# EAGLE board DDS_rev03JD (EAGLE 7.5.0)
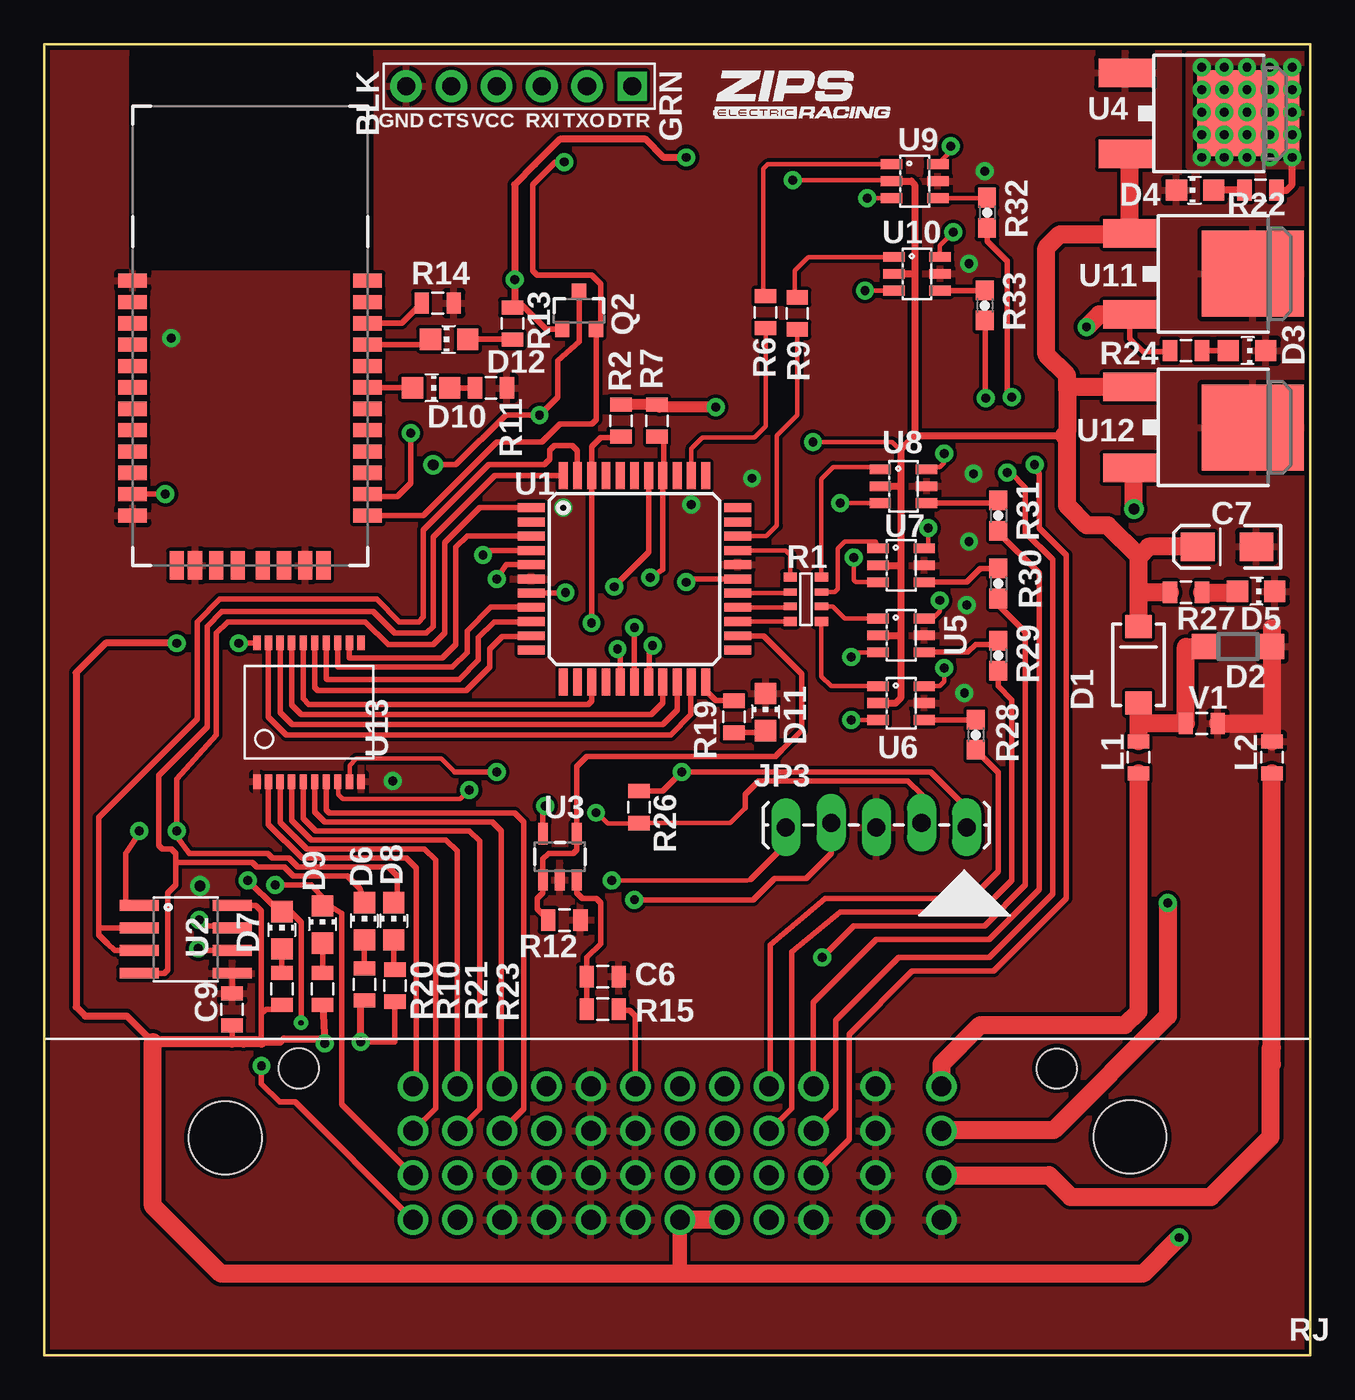
[diagram p0: board, top side]
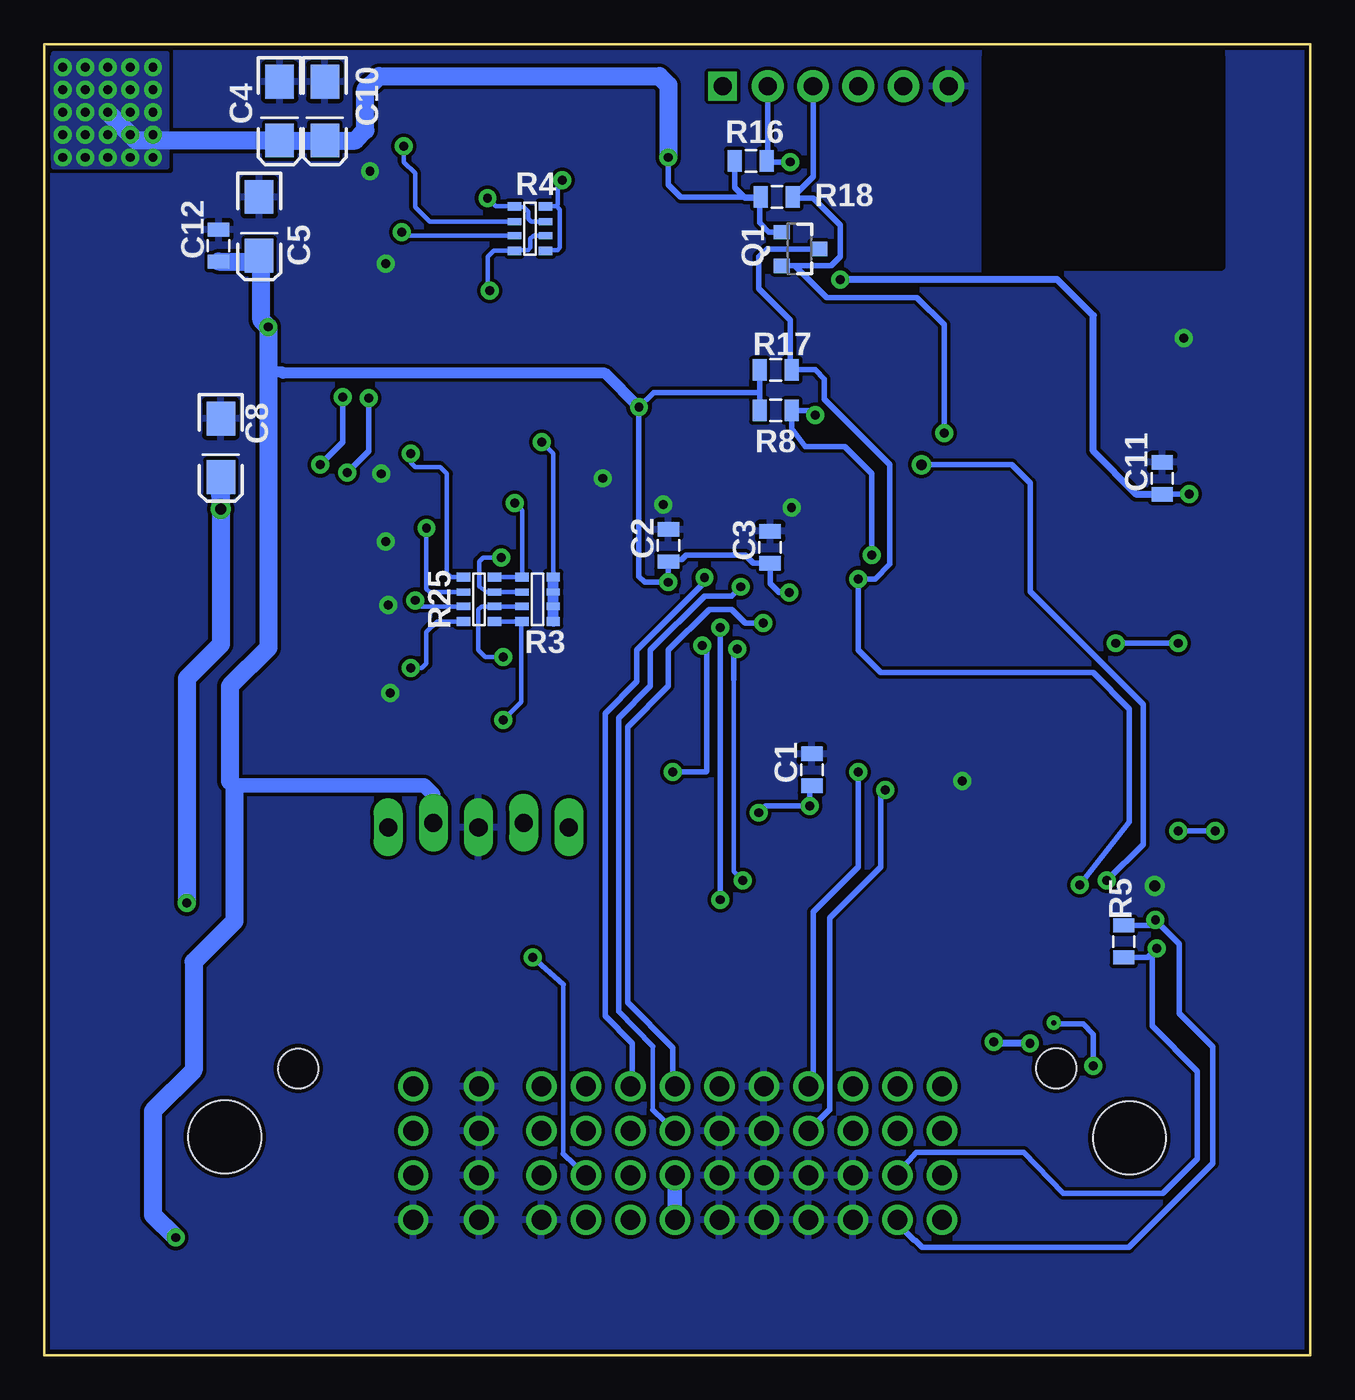
[diagram p1: board, bottom side, seen from below]

Size 71.12 x 73.66 mm. Coordinates in mm from the lower left corner, seen from the top.
Copper layers (1*16): Top 0.035mm / dielectric 1.5mm / Bottom 0.035mm
Design rules "SparkFun *": minimum track width 8mil, minimum drill 18mil, track to track 8mil, track to pad 8mil, pad to pad 8mil, via to via 8mil, smd to smd 8mil, copper to edge 10mil, drill to drill 8mil, minimum pad ring 12mil, minimum via ring 10mil, stop-mask expansion 4mil, vias tented up to drill 25mil, thermal gap 10mil
tRestrict: area 5,61.2 to 18.3,73
bRestrict: area 5,61.2 to 18.3,73

## Footprints (pad centres in the part's own frame; a part is rotated, then mirrored left to right if it is on the bottom)
0805 = smd 0.8 x 1.2: 1 -0.9,0; 2 0.9,0
EIA3216-16V = smd 1.9 x 1.6: A 1.65,0; C -1.65,0
SMA = smd 1.27 x 1.47: A -2.15,0; C 2.15,0
SOD-123 = smd 1.4 x 1.4: A 1.9,0; C -1.9,0
CHIP_LED0805 = smd 1.2 x 1.2: A 0,-1.05; C 0,1.05
36638-M = drill 1.1: 1 20.7,15.1; 2 20.7,12.6; 3 20.7,10.1; 4 20.7,7.6; 5 23.2,15.1; 6 23.2,12.6; 7 23.2,10.1; 8 23.2,7.6; 9 25.7,15.1; 10 25.7,12.6; 11 25.7,10.1; 12 25.7,7.6; 13 28.2,15.1; 14 28.2,12.6; 15 28.2,10.1; 16 28.2,7.6; 17 30.7,15.1; 18 30.7,12.6; 19 30.7,10.1; 20 30.7,7.6; 21 33.2,15.1; 22 33.2,12.6; 23 33.2,10.1; 24 33.2,7.6; 25 35.7,15.1; 26 35.7,12.6; 27 35.7,10.1; 28 35.7,7.6; 29 38.2,15.1; 30 38.2,12.6; 31 38.2,10.1; 32 38.2,7.6; 33 40.7,15.1; 34 40.7,12.6; 35 40.7,10.1; 36 40.7,7.6; 37 43.2,15.1; 38 43.2,12.6; 39 43.2,10.1; 40 43.2,7.6; 41 46.7,15.1; 42 46.7,12.6; 43 46.7,10.1; 44 46.7,7.6; 45 50.4,15.1; 46 50.4,12.6; 47 50.4,10.1; 48 50.4,7.6 | hole 2.25: 56.87,16.1; 14.28,16.12 | hole 4.1: 60.99,12.26; 10.16,12.21
1X05_LOCK_LONGPADS = drill 1.016 long: 1 0,0; 2 2.54,-0.254; 3 5.08,0; 4 7.62,-0.254; 5 10.16,0
FTDI_DEVICE_SIDE = drill 1 square: P$1 -6.35,0 | drill 1.016 pad 1.778: P$2 -3.81,0; P$3 -1.27,0; P$4 1.27,0; P$5 3.81,0; P$6 6.35,0
SOT23 = smd 0.8 x 0.9: 1 -0.95,-1; 2 0.95,-1; 3 0,1.1
MNR14 = smd 0.5 x 0.75: 1 -1.25,-0.9; 4 1.25,-0.9; 5 1.25,0.85; 8 -1.25,0.85 | smd 0.4 x 0.75: 2 -0.4,-0.9; 3 0.4,-0.9; 6 0.4,0.85; 7 -0.4,0.85
0603 = smd 1.1 x 1: 1 -0.85,0; 2 0.85,0
TQFP-44 = smd 1.5 x 0.5: 1 -5.8,4; 2 -5.8,3.2; 3 -5.8,2.4; 4 -5.8,1.6; 5 -5.8,0.8; 6 -5.8,0; 7 -5.8,-0.8; 8 -5.8,-1.6; 9 -5.8,-2.4; 10 -5.8,-3.2; 11 -5.8,-4; 23 5.8,-4; 24 5.8,-3.2; 25 5.8,-2.4; 26 5.8,-1.6; 27 5.8,-0.8; 28 5.8,0; 29 5.8,0.8; 30 5.8,1.6; 31 5.8,2.4; 32 5.8,3.2; 33 5.8,4 | smd 0.5 x 1.5: 12 -4,-5.8; 13 -3.2,-5.8; 14 -2.4,-5.8; 15 -1.6,-5.8; 16 -0.8,-5.8; 17 0,-5.8; 18 0.8,-5.8; 19 1.6,-5.8; 20 2.4,-5.8; 21 3.2,-5.8; 22 4,-5.8; 34 4,5.8; 35 3.2,5.8; 36 2.4,5.8; 37 1.6,5.8; 38 0.8,5.8; 39 0,5.8; 40 -0.8,5.8; 41 -1.6,5.8; 42 -2.4,5.8; 43 -3.2,5.8; 44 -4,5.8
SO-8 = smd 0.61 x 2.21: 1 -1.905,-2.616; 2 -0.635,-2.616; 3 0.635,-2.616; 4 1.905,-2.616; 5 1.905,2.616; 6 0.635,2.616; 7 -0.635,2.616; 8 -1.905,2.616
SOT23-5 = smd 0.55 x 1.2: 1 -0.95,-1.3; 2 0,-1.3; 3 0.95,-1.3; 4 0.95,1.3; 5 -0.95,1.3
DPAK = smd 1.6 x 3: 1 -2.28,-4.04; 3 2.28,-4.04 | smd 4.826 x 5.715: 2 0,2.858
SOT23-6 = smd 0.55 x 1.2: 1 -0.95,-1.3; 2 0,-1.3; 3 0.95,-1.3; 4 0.95,1.3; 5 0,1.3; 6 -0.95,1.3
SSOP-20 = smd 0.813 x 0.406: 1 -3.9,2.925; 2 -3.9,2.275; 3 -3.9,1.625; 4 -3.9,0.975; 5 -3.9,0.325; 6 -3.9,-0.325; 7 -3.9,-0.975; 8 -3.9,-1.625; 9 -3.9,-2.275; 10 -3.9,-2.925; 11 3.9,-2.925; 12 3.9,-2.275; 13 3.9,-1.625; 14 3.9,-0.975; 15 3.9,-0.325; 16 3.9,0.325; 17 3.9,0.975; 18 3.9,1.625; 19 3.9,2.275; 20 3.9,2.925
RN41 = smd 0.8 x 1.6: 1 -6.6,-6.6; 2 -5.4,-6.6; 3 -4.2,-6.6; 4 -3,-6.6; 5 -1.8,-6.6; 6 -0.6,-6.6; 7 0.6,-6.6; 8 1.8,-6.6; 9 3,-6.6; 10 4.2,-6.6; 11 5.4,-6.6; 12 6.6,-6.6; 13 6.6,6.6; 14 5.4,6.6; 15 4.2,6.6; 16 3,6.6; 17 1.8,6.6; 18 0.6,6.6; 19 -0.6,6.6; 20 -1.8,6.6; 21 -3,6.6; 22 -4.2,6.6; 23 -5.4,6.6; 24 -6.6,6.6 | smd 1.6 x 0.8: 28 9.4,3.1; 29 9.4,-3.1; 30 9.4,4.122; 31 9.4,1.9; 32 9.4,0.7; 33 9.4,-0.7; 34 9.4,-1.9; 35 9.4,-4.122

## Placement (x,y rotation side)
C1  \0.1UF  [0805]  28,32.89 90 bottom
C2  \0.1UF  [0805]  36.07,45.5 90 bottom
C3  \0.1UF  [0805]  30.35,45.4 90 bottom
C4  10UF  [EIA3216-16V]  57.91,69.91 270 bottom
C5  10UF  [EIA3216-16V]  59.05,63.44 270 bottom
C6  1UF  [0805]  31.37,21.27 0 top
C7  10UF  [EIA3216-16V]  66.45,45.43 180 top
C8  10UF  [EIA3216-16V]  61.21,50.99 270 bottom
C9  \0.1UF  [0805]  10.54,19.43 90 top
C10  10UF  [EIA3216-16V]  55.37,69.91 270 bottom
C11  \0.1UF  [0805]  8.32,49.28 90 bottom
C12  \0.1UF  [0805]  61.34,62.36 90 bottom
D1  S1B  [SMA]  61.47,38.8 90 top
D2  11V  [SOD-123]  67.06,39.81 0 top
D3  GREEN  [CHIP_LED0805]  67.56,56.45 270 top
D4  GREEN  [CHIP_LED0805]  64.64,65.47 90 top
D5  GREEN  [CHIP_LED0805]  68.07,42.93 270 top
D6  GREEN  [CHIP_LED0805]  17.97,24.38 0 top
D7  GREEN  [CHIP_LED0805]  13.34,23.88 0 top
D8  RED  [CHIP_LED0805]  19.62,24.38 0 top
D9  RED  [CHIP_LED0805]  15.62,24.19 0 top
D10  AMBER  [CHIP_LED0805]  21.72,54.36 270 top
D11  AMBER  [CHIP_LED0805]  40.51,36.13 0 top
D12  YELLOW  [CHIP_LED0805]  22.73,57.09 90 top
J1  36638NEW  [36638-M]  0,0 0 top
JP3  [1X05_LOCK_LONGPADS]  51.82,29.65 180 top
JP19  FTDI_DEVICE  [FTDI_DEVICE_SIDE]  26.67,71.31 180 top
L1  L_FB_2A  [0805]  61.47,33.59 90 top
L2  L_FB_2A  [0805]  68.96,33.59 90 top
Q1  BSS123  [SOT23]  28.7,62.17 270 bottom
Q2  BSS123  [SOT23]  30.04,58.67 0 top
R1  1K  [MNR14]  42.8,42.48 270 top
R2  2.2K  [0805]  32.38,52.51 90 top
R3  RN-4_10K  [MNR14]  43.43,42.48 90 bottom
R4  10K  [MNR14]  43.81,63.31 270 bottom
R5  120  [0805]  10.48,23.24 90 bottom
R6  1K  [0805]  40.51,58.61 90 top
R7  2.2K  [0805]  34.42,52.51 90 top
R8  10K  [0805]  30.04,53.09 180 bottom
R9  1K  [0805]  42.29,58.55 90 top
R10  1K  [0805]  15.62,20.57 270 top
R11  330  [0805]  25.08,54.36 180 top
R12  10K  [0805]  29.21,24.45 180 top
R13  330  [0805]  26.29,57.98 90 top
R14  100K  [0805]  22.1,59.12 180 top
R15  10K  [0805]  31.37,19.43 0 top
R16  10K  [0805]  31.43,67.12 180 bottom
R17  10K  [0805]  30.04,55.37 180 bottom
R18  10K  [0805]  29.97,65.09 180 bottom
R19  1K  [0805]  38.73,35.88 90 top
R20  1K  [0805]  13.34,20.57 270 top
R21  1K  [0805]  17.97,20.83 270 top
R22  330  [0805]  68.33,65.47 0 top
R23  1K  [0805]  19.68,20.76 270 top
R24  1K  [0805]  64.14,56.45 180 top
R25  RN-4_10K  [MNR14]  46.74,42.48 90 bottom
R26  10K  [0805]  33.4,30.8 270 top
R27  1.2K  [0805]  64.14,42.86 180 top
R28  RESPLACEHOLDER  [0603]  52.32,34.86 270 top
R29  RESPLACEHOLDER  [0603]  53.59,39.31 270 top
R30  RESPLACEHOLDER  [0603]  53.59,43.37 270 top
R31  RESPLACEHOLDER  [0603]  53.59,47.18 270 top
R32  RESPLACEHOLDER  [0603]  52.96,64.2 270 top
R33  RESPLACEHOLDER  [0603]  52.83,58.99 270 top
U1  PIC18F45K22  [TQFP-44]  33.15,43.62 0 top
U2  SN75HVD08DRSOIC  [SO-8]  7.94,23.37 270 top
U3  OPA344  [SOT23-5]  28.96,28 0 top
U4  NCP1117DT_3.3  [DPAK]  64.77,69.79 270 top
U5  DMG6602SVTQ  [SOT23-6]  48.13,40.45 270 top
U6  DMG6602SVTQ  [SOT23-6]  48.13,36.64 270 top
U7  DMG6602SVTQ  [SOT23-6]  48.13,44.39 270 top
U8  DMG6602SVTQ  [SOT23-6]  48.26,48.83 270 top
U9  DMG6602SVTQ  [SOT23-6]  48.9,65.98 270 top
U10  DMG6602SVTQ  [SOT23-6]  49.02,60.77 270 top
U11  NCV7805BDTRKG  [DPAK]  65.02,60.77 270 top
U12  NCV7805BDTRKG  [DPAK]  65.02,52.13 270 top
U13  MAX6818  [SSOP-20]  14.86,36.13 90 top
U$1  INDPK1  [PICKIT-PIN-1]  51.69,27.24 180 top
U$2  BLUETOOTH-RN41"  [RN41]  11.56,53.78 270 top
U$3  LOGO16-2-M  [2016-2-LOGO-M]  37.49,69.44 0 top
V1  10.8V  [0805]  65.02,35.5 0 top

## Library data of the parts
C1-C3 C9 C11 C12 = FSAE Electric; PARTNO: CC0805ZRY5V9BB104
C4 C5 C7 C8 C10 = FSAE Electric; PARTNO: T491A106M016AT
C6 = FSAE Electric; PARTNO: UMK212F105ZG-T
D1 = FSAE Electric; PARTNO: S1B
D2 = FSAE Electric; PARTNO: NZH11C,115
D3-D7 = FSAE Electric; PARTNO: LTST-S220GKT
D8 D9 = FSAE Electric; PARTNO: LH R974-LP-1
D10 D11 = FSAE Electric; PARTNO: HSMA-C170
D12 = FSAE Electric; PARTNO: LY R976-PS-36
J1 R28-R33 U$1 = FSAE Electric
JP3 JP19 = SparkFun-Connectors
L1 L2 = FSAE Electric; PARTNO: FBMH2012HM121-T
Q1 Q2 = FSAE Electric; PARTNO: BSS123,215
R1 = FSAE Electric; PARTNO: MNR14ERAPJ102
R2 R7 = FSAE Electric; PARTNO: RC0805FR-072K2L
R3 R4 R25 = FSAE Electric; PARTNO: MNR14ERAPJ103
R5 = FSAE Electric; PARTNO: RC0805FR-07120RL
R6 R9 R10 R19-R21 R23 R24 = FSAE Electric; PARTNO: RC0805FR-071KL
R8 R12 R15-R18 R26 = FSAE Electric; PARTNO: RC0805FR-0710KL
R11 R13 R22 = FSAE Electric; PARTNO: RC0805FR-07330RL
R14 = FSAE Electric; PARTNO: RC0805FR-07100KL
R27 = FSAE Electric; PARTNO: RC0805FR-071K2L
U1 = FSAE Electric; PARTNO: PIC18F45K22T-I/PT
U2 = FSAE Electric; PARTNO: SN75176BDR
U3 = FSAE Electric; PARTNO: OPA344NA/3K
U4 = FSAE Electric; PARTNO: NCP1117DT33RKG
U5-U10 = FSAE Electric; PARTNO: DMG6602SVTQ-7
U11 U12 = FSAE Electric; PARTNO: NCV7805BDTRKG
U13 = FSAE Electric; PARTNO: MAX6818EAP+
U$2 = SparkFun-RF; PARTNO: RN41-I/RM
U$3 = Pic
V1 = FSAE Electric; PARTNO: VCAS080509A200DP

## Nets
5V2: C8.A J1.46 U12.3
+: J1.45 L1.1
+3V3: C4.A C10.A C11.1 Q1.1 Q2.1 R13.2 R16.2 R18.2 R22.2 U4.2 U$2.11
+5V: C1.1 C2.1 C3.1 C5.A C9.1 C12.1 J1.27 J1.28 J1.32 JP3.2 R2.2 R7.2 R8.2 R10.2 R17.2 R20.2 R21.2 R23.2 R24.2 R26.2 U1.7 U1.28 U2.8 U3.5 U11.3 U13.20
+9V: C7.A D1.C R3.1 R3.2 R3.3 R3.4 R4.5 R4.8 R27.2 U4.3 U5.2 U6.2 U7.2 U8.2 U9.2 U10.2 U11.1 U12.1
-: J1.47 L2.1
_OLED0: J1.39 R32.2
_OLED1: J1.38 R33.2
_OLED2: J1.37 R31.2
_OLED3: J1.35 R30.2
_OLED4: J1.34 R29.2
_OLED5: J1.33 R28.2
ACK: J1.13 U13.9
B1: J1.1 U13.2
B2: J1.2 U13.3
BREAK: J1.6 U13.5
BSAVE: J1.5 U13.4
GHT: D1.A D2.C L1.2 V1.1
GND: C1.2 C2.2 C3.2 C4.C C5.C C6.2 C7.C C8.C C9.2 C10.C C11.2 C12.2 D2.A D3.C D4.C D5.C D11.C J1.11 J1.12 J1.15 J1.16 J1.17 J1.18 J1.19 J1.20 J1.22 J1.23 J1.24 J1.40 J1.41 J1.42 J1.43 J1.44 J1.48 JP3.3 JP19.P$6 L2.2 R11.1 R12.1 R14.1 U1.6 U1.29 U2.5 U3.2 U4.1 U5.5 U6.5 U7.5 U8.5 U9.5 U10.5 U11.2 U12.2 U13.1 U13.10 U$2.1 U$2.12 U$2.28 U$2.29 V1.2
LED0: R6.1 U1.35
LED1: R9.1 U1.31
LED2: R1.1 U1.30
LED3: R1.2 U1.27
LED4: R1.3 U1.26
LED5: R1.4 U1.25
N$1: D11.A R19.1
N$2: R19.2 U1.22
N$3: JP19.P$3 Q1.2 R18.1 U$2.14
N$4: J1.10 U13.7
N$5: R28.1 U6.4
N$6: D12.A R13.1
N$7: R25.8 U6.6
N$8: D12.C U$2.21
N$9: D10.A U$2.19
N$10: R14.2 U$2.22
N$11: D6.A R21.1
N$12: JP19.P$2 Q2.2 R16.1 U$2.13
N$13: D10.C R11.2
N$14: D8.A R23.1
N$15: D5.A R27.1
N$16: R3.8 R25.1 U6.3
N$17: D9.A R10.1
N$18: D7.A R20.1
N$19: D3.A R24.1
N$20: R29.1 U5.4
N$21: R25.7 U5.6
N$22: R3.7 R25.2 U5.3
N$23: R1.5 U6.1
N$24: J1.21 R15.2
N$25: D4.A R22.1
N$26: C6.1 R15.1 U3.3
N$27: R25.6 U7.6
N$28: R3.6 R25.3 U7.3
N$29: R1.6 U5.1
N$30: R25.5 U8.6
N$31: R3.5 R25.4 U8.3
N$32: R30.1 U7.4
N$33: R4.1 R4.7 U9.3
N$34: R4.2 U9.6
N$35: R31.1 U8.4
N$36: R4.3 U10.6
N$37: R4.4 R4.6 U10.3
N$38: R32.1 U9.4
N$39: R33.1 U10.4
N$40: JP3.4 U1.17
N$41: R1.7 U7.1
N$42: R1.8 U8.1
N$43: JP3.5 U1.16
N$44: R6.2 U9.1
N$45: R9.2 U10.1
N$46: JP3.1 R26.1 U1.18
O1: U1.3 U13.12
O2: U1.8 U13.13
O3: U1.9 U13.14
O4: U1.10 U13.15
O5: U1.14 U13.16
O6: U1.19 U13.17
O7: U1.20 U13.18
O8: U1.21 U13.19
POS-SWITCH: J1.26 U1.38
RS-A: J1.7 R5.1 U2.6
RS-B: J1.8 R5.2 U2.7
RX1: D8.C U1.1 U2.1
RX2: D9.C J1.3 Q1.3 R17.1 U1.5
SCL: J1.29 R7.1 U1.37
SDA: J1.25 R2.1 U1.42
START: J1.9 U13.6
TALK: J1.14 U13.8
TX1: D6.C U1.44 U2.4
TX2: D7.C J1.4 Q2.3 R8.1 U1.4
U2-RE/DE: U1.43 U2.2 U2.3
VOL: R12.2 U1.24 U3.1 U3.4

## Tracks (layer width: path | path; a pad name or v marks a point on that pad's centre or on a via)
5V2  (via drill 0.5, 0.6)
  Top 1.016: v63.12,25.4 63.12,19.05 56.71,12.64 50.44,12.64 J1.46 | U12.3 61.04,49.85 61.11,49.78 | 61.11,49.78 61.21,49.68 | v61.21,47.55 61.21,49.89 | 61.21,49.89 61.27,49.94 | 61.21,49.89 61.11,49.78
  Bottom 1.016: v61.21,47.55 C8.A 61.21,48.51 61.27,48.51 v61.21,47.55 | v61.21,47.55 61.21,39.94 63.12,38.04 v63.12,25.4
+
  Top 1.016: J1.45 50.4,16.36 52.58,18.54 60.71,18.54 61.47,19.3 L1.1
+3V3  (via drill 0.5)
  Top 0.305: U$2.11 v6.79,48.38 v6.79,48.39 | 27.94,67.31 27.56,66.93 | 26.42,59 26.85,59 28.19,57.66 29.07,57.66 Q2.1
  Top 0.406: R22.2 69.79,65.47 70.1,65.79 v70.1,67.31 | v36.07,67.31 34.8,67.31 33.78,68.33 28.96,68.33 27.56,66.93 26.42,65.79 v26.42,60.45 26.42,59 R13.2
  Top 0.61: 70.24,68.44 v70.1,68.58
  Top 1.016: U4.2 v67.56,69.85
  Bottom 0.305: R16.2 32.33,65.61 31.75,65.02 30.94,65.02 | 30.94,65.02 R18.2 35.37,65.09 36.07,65.79 v36.07,67.31 | 30.94,65.02 30.94,63.64 30.41,63.12 Q1.1 | v6.79,48.39 8.31,48.39 C11.1
  Bottom 0.406: C11.1 9.77,48.38 12.19,50.8 12.19,58.42 14.22,60.45 v26.42,60.45
  Bottom 1.016: v36.07,67.31 36.07,71.37 36.58,71.88 52.32,71.88 53.09,71.12 53.09,68.83 53.66,68.26 C10.A C4.A 65.98,68.26 v67.56,69.85
  other vias: 65.02,67.31 65.02,68.58 65.02,69.85 65.02,71.12 65.02,72.39 66.29,72.39 66.29,71.12 66.29,69.85 66.29,68.58 66.29,67.31 67.56,67.31 67.56,68.58 67.56,71.12 67.56,72.39 68.83,72.39 68.83,71.12 68.83,69.85 68.83,68.58 68.83,67.31 70.1,69.85 70.1,71.12 70.1,72.39
  pour Bottom: 64.26,66.8 64.26,73.15 70.61,73.15 70.61,72.9 70.87,72.9 70.61,66.8
  pour Top: 64.26,66.8 70.87,66.8 70.87,73.15 64.26,73.15
+5V  (via drill 0.5)
  Top 0.254: v30.99,30.48 31.04,30.48 31.65,29.87 33.37,29.87 R26.2 38.53,29.9 39.37,30.73
  Top 0.305: U1.7 29.23,42.83 v29.27,42.86 | 11.3,17.72 11.18,17.59 | U1.28 36.26,43.62 v36.07,43.43 | 12.19,19.18 12.19,17.59 | U13.20 10.95,40.03 v10.92,40.01 | C9.1 10.54,17.59 | U3.5 28.01,30.74 v28.13,30.86 | 12.19,19.18 12.45,19.43 13.58,19.43 R20.2 | U2.8 11.87,25.27 12.19,24.96 12.19,19.18 | U11.3 60.98,57.13 61.72,56.39 63.17,56.39 R24.2 | R23.2 19.68,17.59 v17.78,17.59 | JP3.2 49.28,31.5 48.51,32.26 40.13,32.26 39.37,31.5 39.37,30.73
  Top 0.406: 12.19,17.59 13.27,17.59 13.46,17.78 15.49,17.78 v15.75,17.53 R10.2 | v17.78,17.59 17.78,19.86 R21.2 | v7.43,40.01 3.43,40.01 1.78,38.35 1.78,19.56 2.29,19.05 4.64,19.05 6.1,17.59 | 10.53,18.54 C9.1
  Top 0.61: 12.19,17.59 11.18,17.59 10.54,17.59 6.1,17.59 | v37.72,53.28 34.55,53.28 R7.2 R2.2 | 60.97,58.5 U11.3
  Top 0.813: J1.28 35.7,4.71 35.56,4.57
  Top 1.016: U11.3 59.25,58.49 v58.55,57.78 | 6.1,17.59 6.1,8.38 9.91,4.57 35.56,4.57 61.72,4.57 v63.75,6.6 | J1.32 J1.28
  Bottom 0.305: v29.27,42.86 29.84,42.86 30.35,43.37 C3.1 31.29,44.5 31.75,44.96 35.05,44.96 35.31,44.7 35.87,44.7 C2.1 v36.07,43.43 37.4,43.43 37.72,43.75 v37.72,53.28 36.89,54.1 30.99,54.1 | v10.92,40.01 v7.43,40.01 | v30.99,30.48 30.61,30.86 v28.13,30.86 28.13,31.87 C1.1 | R17.2 30.94,54.15 30.99,54.1 | R8.2 30.94,54.05 30.99,54.1
  Bottom 0.406: v15.75,17.53 17.72,17.53 v17.78,17.59
  Bottom 0.61: v37.72,53.28 39.62,55.18 57.72,55.18 57.78,55.24 58.42,55.24 58.55,55.12
  Bottom 0.813: J1.27 J1.28 | 60.71,32.26 60.45,32 49.78,32 49.28,31.5 JP3.2
  Bottom 1.016: C12.1 59.38,61.46 C5.A 58.93,61.66 58.93,58.17 v58.55,57.78 58.55,55.12 58.55,39.75 60.71,37.59 60.71,32.26 | v63.75,6.6 65.02,7.87 65.02,13.72 62.74,16 62.74,22.1 60.45,24.38 60.45,32
+9V  (via drill 0.5)
  Top 0.254: v43.18,51.31 47.62,51.31 48.13,50.8 | v42.04,66.04 47.53,66.04 U9.2
  Top 0.406: U6.2 47.82,36.64 48.13,36.96 48.13,40.51 | 48.13,40.51 48.13,44.32 | 48.13,44.32 48.13,48.77 | 48.13,48.77 48.13,50.8 48.13,50.93 48.9,51.69 49.02,51.69 | 49.02,51.69 57.28,51.69 | 61.09,41.33 D1.C | U8.2 48.07,48.83 48.13,48.77 | U7.2 48.07,44.39 48.13,44.32 | U5.2 48.07,40.45 48.13,40.51 | U9.2 48.7,65.98 48.9,65.79 48.9,60.83 | 48.9,60.83 48.9,51.82 49.02,51.69 | U10.2 48.83,60.77 48.9,60.83
  Top 1.016: U4.3 60.98,67.25 U11.1 60.93,62.99 | D1.C 61.47,42.88 | 61.47,42.88 61.47,44.86 | 61.47,44.86 61.47,44.91 59.74,46.63 58.57,46.63 57.45,47.75 57.45,51.87 | 57.45,54.3 57.45,55.07 56.29,56.24 56.29,62.23 57.05,62.99 60.71,62.99 | 60.93,62.99 61.16,62.99 61.27,62.89 60.81,62.89 60.71,62.99 | 60.71,62.99 60.93,62.99 | U12.1 57.56,54.41 57.45,54.3 | 57.45,54.3 57.45,51.87 | 57.45,51.87 57.28,51.69 | C7.A 62.04,45.43 61.47,44.86 | R27.2 61.48,42.86 61.47,42.88
  Bottom 0.254: R3.4 42.53,50.66 v43.18,51.31 | R4.5 42.92,62.1 42.29,62.1 42.16,62.23 42.16,64.39 42.33,64.56 R4.8 42.37,64.56 42.29,64.64 42.29,65.79 v42.04,66.04
  Bottom 0.61: R3.1 R3.2 R3.3 R3.4
-
  Top 1.016: 68.96,16.35 68.96,17.27 | 68.96,17.27 L2.1 | J1.47 56.45,10.1 57.66,8.89 65.53,8.89 68.9,12.26 68.9,17.21 68.96,17.27
_OLED0  (via drill 0.5)
  Top 0.305: R32.2 52.96,62.61 54.1,61.47 54.1,54.1 v54.36,53.85 | J1.39 45.21,12.11 45.21,18.03 48.77,21.59 53.34,21.59 57.4,25.65 57.4,44.96 55.88,46.48 55.88,49.53 55.63,49.78 v55.63,50.04
  Bottom 0.305: v54.36,53.85 54.36,51.31 v55.63,50.04
_OLED1  (via drill 0.5)
  Top 0.305: R33.2 52.87,58.1 52.87,53.81 v52.9,53.78 | v54.1,49.59 54.29,49.59 55.12,48.77 55.12,46.23 56.64,44.7 56.64,25.91 53.09,22.35 48.01,22.35 44.45,18.8 44.45,13.85 J1.38
  Bottom 0.305: v52.9,53.78 52.9,50.8 v54.1,49.59
_OLED2
  Top 0.305: R31.2 53.59,46.23 55.88,43.94 55.88,26.16 53.09,23.37 46.74,23.37 43.18,19.81 43.18,15.12 J1.37
_OLED3  (via drill 0.5)
  Top 0.305: R30.2 53.59,42.16 55.12,40.64 55.12,26.42 52.83,24.13 45.47,24.13 v43.69,22.35
  Bottom 0.254: 41.96,20.83 41.96,11.31
  Bottom 0.305: v43.69,22.35 41.96,20.83 | 41.96,11.31 J1.35
_OLED4
  Top 0.305: J1.34 41.97,13.87 41.97,22.67 44.7,24.89 52.58,24.89 54.36,26.67 54.36,36.83 53.59,37.59 R29.2
_OLED5
  Top 0.305: J1.33 40.77,15.17 40.77,23.05 43.88,25.65 52.07,25.65 53.59,27.18 53.59,32.74 R28.2
ACK  (via drill 0.5 pad 0.3)
  Top 0.254: 17.14,32.22 17.14,33.15 17.53,33.53 22.29,33.53 23.05,32.77
  Top 0.305: v25.4,32.77 23.05,32.77 | U13.9 17.14,32.22
  Bottom 0.305: J1.13 27.94,15.36 27.94,24.89 25.4,27.43 v25.4,32.77
B1
  Top 0.305: U13.2 12.58,29.83 14.48,27.94 20.32,27.94 20.89,27.37 20.89,15.16 J1.1
B2
  Top 0.305: U13.3 13.23,29.95 14.73,28.45 21.34,28.45 21.97,27.81 21.97,13.87 J1.2
BREAK
  Top 0.305: U13.5 14.53,30.17 15.24,29.46 23.88,29.46 24.45,28.89 24.45,13.85 J1.6
BSAVE
  Top 0.305: U13.4 13.88,30.06 14.99,28.96 22.54,28.96 23.18,28.32 23.18,15.12 J1.5
GHT
  Top 1.016: L1.2 61.47,35.5 | 61.47,35.5 D1.A | 61.47,35.5 V1.1 64.12,39.8 D2.C
GND  (via drill 0.5, 0.6)
  Top 0.305: C9.2 10.54,21.53
  Top 1.016: V1.2 68.96,35.5 | 68.96,35.5 L2.2 | 68.96,35.5 D2.A 68.96,40.83
  other vias: 29.15,47.62 7.11,57.15 19.56,32.26 51.69,37.21 51.82,42.16 51.94,45.72 52.2,49.53 51.94,61.34 52.83,66.55 39.75,49.28 36.35,47.8 8.74,26.37
  pour Bottom (rank 4): -1.65,74.87 79.63,74.87 79.63,-3.87 -1.65,-3.87
  pour Top (rank 4): -0.64,77.41 77.09,77.41 77.09,-6.41 -0.64,-6.41
LED0
  Top 0.254: U1.35 36.35,50.95 36.96,51.56 39.88,51.56 40.51,52.2 R6.1
LED1
  Top 0.254: R9.1 42.29,52.83 41.15,51.69 41.15,46.61 40.56,46.02 U1.31
LED2
  Top 0.254: U1.30 41.64,45.22 41.91,44.96 41.91,43.74 R1.1
LED3
  Top 0.254: U1.27 41.84,42.83 R1.2
LED4
  Top 0.254: U1.26 41.84,42.02 R1.3
LED5
  Top 0.254: U1.25 R1.4
N$1
  Top 0.305: R19.1 40.41,34.98 D11.A
N$2
  Top 0.305: U1.22 37.15,37.34 37.71,36.78 R19.2
N$3  (via drill 0.5)
  Top 0.305: v20.57,51.82 20.57,49.02 19.81,48.26 18.28,48.26 U$2.14
  Bottom 0.305: JP19.P$3 27.94,66.22 R18.1 29.01,65.02 27.94,65.02 26.42,63.5 26.42,61.72 26.92,61.22 28.96,61.22 | v20.57,51.82 20.57,57.91 22.1,59.44 27.18,59.44 28.96,61.22 | Q1.2 28.96,61.22
N$4
  Top 0.305: U13.7 15.83,30.65 16,30.48 26.42,30.48 26.92,29.97 26.92,13.82 J1.10
N$5
  Top 0.305: U6.4 52.3,35.69 R28.1
N$6
  Top 0.305: D12.A 26.28,57.09 R13.1
N$7  (via drill 0.5)
  Top 0.254: v50.55,38.61 50.55,37.85 50.29,37.59 U6.6
  Bottom 0.254: R25.8 49.07,41.23 49.66,40.64 49.66,38.86 49.91,38.61 v50.55,38.61
N$8
  Top 0.305: U$2.21 21.38,56.78 D12.C
N$9
  Top 0.305: U$2.19 20.64,54.38 D10.A
N$10
  Top 0.305: U$2.22 20.06,57.98 R14.2
N$11
  Top 0.305: D6.A R21.1
N$12  (via drill 0.5)
  Top 0.305: U$2.13 21.28,47.18 25.4,51.31 27.94,51.31 28.96,52.32 30.73,52.32 30.99,52.58 Q2.2 31.24,57.93 31.24,60.2 30.73,60.71 27.69,60.71 27.43,60.96 27.43,65.79 28.7,67.06 v29.21,67.06
  Bottom 0.305: JP19.P$2 30.48,67.17 R16.1 30.47,67.06 v29.21,67.06
N$13
  Top 0.305: D10.C R11.2
N$14
  Top 0.305: D8.A 19.62,21.73 R23.1
N$15
  Top 1.016: R27.1 66.96,42.86 D5.A
N$16  (via drill 0.5)
  Top 0.254: v45.34,35.69 U6.3
  Bottom 0.254: R3.8 R25.1 44.41,41.23 44.32,41.15 44.32,36.7 v45.34,35.69
N$17
  Top 0.305: R10.1 D9.A
N$18
  Top 0.305: R20.1 D7.A
N$19
  Top 0.305: R24.1 D3.A
N$20
  Top 0.305: U5.4 51.88,39.5 52.32,39.94 53.38,39.94 R29.1
N$21  (via drill 0.5)
  Top 0.254: v50.29,42.42 50.29,41.78 49.91,41.4 U5.6
  Bottom 0.254: R25.7 49.96,42.08 v50.29,42.42
N$22  (via drill 0.5)
  Top 0.254: v45.34,39.24 45.59,39.5 U5.3
  Bottom 0.254: R3.7 R25.2 46.56,42.08 46.74,41.91 46.74,39.62 46.35,39.24 v45.34,39.24
N$23
  Top 0.254: R1.5 43.65,38.14 44.2,37.59 U6.1
N$24
  Top 0.305: J1.21 33.2,19.06 32.89,19.37 32.33,19.37 R15.2
N$25
  Top 0.406: R22.1 D4.A
N$26
  Top 0.305: U3.3 29.91,25.97 30.1,25.78 | 30.1,25.78 30.23,25.65 | R15.1 C6.1 30.47,22.34 31.24,23.11 31.24,25.4 30.99,25.65 30.23,25.65 | 30.23,25.65 30.1,25.78
N$27  (via drill 0.5)
  Top 0.254: v49.66,46.48 49.66,45.56 U7.6
  Bottom 0.254: R25.6 49.49,42.88 49.66,43.05 v49.66,46.48
N$28  (via drill 0.5)
  Top 0.254: v45.47,44.83 45.47,43.56 45.59,43.43 U7.3
  Bottom 0.254: R3.6 R25.3 46.28,42.88 46.71,43.18 46.71,44.61 46.48,44.83 v45.47,44.83
N$29
  Top 0.254: R1.6 44.28,42.08 44.96,41.4 U5.1
N$30  (via drill 0.5)
  Top 0.254: v50.55,50.67 50.55,50.16 50.29,49.91 49.69,49.91 U8.6
  Bottom 0.254: R25.5 48.3,43.73 48.51,43.94 48.51,49.53 48.9,49.91 50.29,49.91 50.55,50.16 v50.55,50.67
N$31  (via drill 0.5)
  Top 0.254: v44.7,47.88 U8.3
  Bottom 0.254: v44.7,47.88 44.28,47.46 R3.5 R25.4
N$32
  Top 0.305: U7.4 51.82,43.44 52.58,44.2 53.57,44.2 R30.1
N$33  (via drill 0.5)
  Top 0.254: v46.23,65.02 U9.3
  Bottom 0.254: R4.7 43.77,63.71 43.94,63.88 43.94,64.26 44.2,64.52 44.67,64.52 R4.1 45.76,64.56 v46.23,65.02
N$34  (via drill 0.5)
  Top 0.254: v50.93,67.94 50.93,67.66 U9.6
  Bottom 0.254: R4.2 49.49,63.71 50.29,64.52 50.29,66.42 50.93,67.06 v50.93,67.94
N$35
  Top 0.305: U8.4 53.49,47.88 R31.1
N$36  (via drill 0.5)
  Top 0.254: v51.05,63.12 50.29,62.36 50.29,61.75 U10.6
  Bottom 0.254: R4.3 50.84,62.91 v51.05,63.12
N$37  (via drill 0.5)
  Top 0.254: v46.1,59.82 47.47,59.82 U10.3
  Bottom 0.254: R4.6 43.64,62.91 43.81,62.74 43.81,62.23 43.94,62.1 44.67,62.1 R4.4 45.89,62.06 46.23,61.72 46.23,59.94 v46.1,59.82
N$38
  Top 0.254: U9.4 52.94,65.03 R32.1
N$39
  Top 0.305: R33.1 52.81,59.82 U10.4
N$40  (via drill 0.5)
  Top 0.305: v33.15,40.89 U1.17 | v33.15,25.59 39.81,25.59 41.02,26.8 42.8,26.8 44.2,28.19 JP3.4
  Bottom 0.305: v33.15,25.59 v33.15,40.89
N$41
  Top 0.254: R1.7 44.41,42.88 44.58,43.05 44.58,45.34 44.96,45.72 46.7,45.72 U7.1
N$42
  Top 0.254: R1.8 43.65,49.24 44.32,49.91 46.83,49.91 U8.1
N$43  (via drill 0.5)
  Top 0.254: v31.88,26.67 39.5,26.67 39.69,26.73
  Top 0.305: U1.16 32.35,39.53 v32.19,39.69 | 39.69,26.73 41.66,28.7 JP3.5
  Bottom 0.254: 32.38,37.97 32.38,27.18 v31.88,26.67
  Bottom 0.305: v32.19,39.69 32.38,39.43 32.38,37.97
N$44
  Top 0.254: U9.1 40.64,66.93 40.39,66.67 40.39,59.64 R6.2
N$45
  Top 0.254: U10.1 42.92,61.72 42.16,60.96 42.16,59.57 R9.2
N$46  (via drill 0.5)
  Top 0.305: v34.16,39.88 33.97,39.69 33.97,37.85 U1.18 | R26.1 34.74,31.7 v35.81,32.77 49.78,32.77 51.82,30.73 JP3.1
  Bottom 0.305: v34.16,39.88 33.91,39.62 33.91,32.83 33.97,32.77 v35.81,32.77
O1
  Top 0.305: U13.12 17.13,39.19 17.14,39.18 22.35,39.18 23.11,39.94 23.11,45.4 23.75,46.04 27.33,46.04 U1.3
O2
  Top 0.305: U13.13 16.48,38.7 16.51,38.67 22.92,38.67 23.75,39.5 23.75,40.7 25.08,42.04 27.33,42.04 U1.8
O3
  Top 0.305: U13.14 15.83,38.01 15.88,37.97 23.3,37.97 24.38,39.05 24.38,40.32 25.27,41.21 27.33,41.21 U1.9
O4
  Top 0.305: U13.15 15.18,37.52 15.37,37.34 23.69,37.34 25.02,38.67 25.02,39.69 25.72,40.39 27.31,40.39 U1.10
O5
  Top 0.305: U13.16 14.53,36.9 14.86,36.58 30.54,36.58 30.73,36.77 30.73,37.81 U1.14
O6
  Top 0.305: U13.17 13.88,36.53 14.41,36.01 34.1,36.01 34.73,36.64 34.73,37.81 U1.19
O7
  Top 0.305: U13.18 13.23,36.1 13.91,35.43 34.73,35.43 35.56,36.26 U1.20
O8
  Top 0.305: U13.19 12.58,35.87 13.59,34.86 35.18,34.86 36.32,36.01 36.32,37.8 U1.21
POS-SWITCH  (via drill 0.5)
  Top 0.305: U1.38 33.95,45.12 v32,43.18
  Bottom 0.254: 36.94,17.34 36.94,13.79
  Bottom 0.305: v32,43.18 32.51,42.67 34.04,42.67 37.08,39.62 37.08,37.59 38.86,35.81 38.86,19.3 36.94,17.34 | 36.94,13.79 J1.26
RS-A  (via drill 0.5)
  Top 0.305: U2.6 8.76,22.73 v8.64,22.86
  Bottom 0.305: R5.1 10.47,22.35 9.14,22.35 v8.64,22.86 8.89,22.61 8.89,18.49 6.35,15.95 6.35,11.02 8.28,9.09 13.87,9.09 16.1,11.38 22.15,11.38 23.2,10.18 J1.7
RS-B  (via drill 0.5)
  Top 0.305: v8.7,24.45 9.02,24.13 10.43,24.13 U2.7
  Bottom 0.305: R5.2 9.01,24.14 v8.7,24.45 7.37,23.11 7.37,19.2 5.49,17.32 5.49,10.77 10.21,6.04 21.79,6.04 22.2,6.45 22.25,6.45 23.2,7.4 J1.8
RX1  (via drill 0.5 pad 0.3)
  Top 0.305: U1.1 24.45,47.62 22.48,45.66 22.48,40.58 21.84,39.94 19.3,39.94 18.03,41.21 10.29,41.21 9.65,40.58 9.65,34.86 7.43,32.38 v7.43,29.46 7.43,29.15 8.13,28.19 12.54,28.19 12.8,27.94 13.72,27.94 14.22,27.43 19.3,27.43 19.81,26.92 19.81,25.62 D8.C | v5.33,29.46 5.08,28.96 4.57,28.19 4.57,25.15 4.7,25.27 U2.1
  Bottom 0.305: v5.33,29.46 v7.43,29.46
RX2  (via drill 0.5, 0.5 pad 0.3)
  Top 0.305: U1.5 25.95,44.42 v25.4,43.62 | v12.95,26.42 14.99,26.42 15.75,25.59 D9.C 16.03,25.24 16.7,24.83 16.7,14.1 J1.3
  Bottom 0.305: v12.95,26.42 10.16,29.97 10.16,36.32 12.19,38.35 24.13,38.35 25.4,39.62 v25.4,43.62 24.45,43.62 23.62,44.45 23.62,50.04 27.3,53.72 27.3,54.86 27.81,55.37 R17.1 29.21,55.7 29.21,58.17 30.99,59.94 30.99,61.72 30.54,62.17 Q1.3
SCL  (via drill 0.5)
  Top 0.305: 34.73,49.44 U1.37 | U1.37 34.75,44.15 v34.04,43.69 | R7.1 34.49,51.61 34.8,51.31 34.8,49.48 U1.37
  Bottom 0.305: v34.04,43.69 34.04,43.43 37.85,39.62 37.85,37.85 39.62,36.07 39.62,19.05 38.1,17.53 38.1,15.2 J1.29
SDA  (via drill 0.5)
  Top 0.305: v30.73,41.15 30.75,41.16 U1.42 30.73,49.44 30.73,51.05 31.24,51.56 31.95,51.56 R2.1
  Bottom 0.305: v30.73,41.15 31.75,41.15 32.51,41.91 33.78,41.91 36.07,39.62 36.07,37.59 38.35,35.31 38.35,19.81 35.81,17.27 35.81,15.21 J1.25
START
  Top 0.305: U13.6 15.18,30.54 15.75,29.97 25.15,29.97 25.65,29.46 25.65,15.15 J1.9
TALK  (via drill 0.5 pad 0.3)
  Top 0.254: 16.51,32.21 16.51,31.5 16.76,31.24 23.37,31.24 v23.88,31.75
  Top 0.305: U13.8 16.51,32.21 | 23.75,31.75 v23.88,31.75
  Bottom 0.305: v23.88,31.75 24.13,31.5 24.13,27.43 26.99,24.57 26.99,13.78 27.02,13.78 J1.14
TX1
  Top 0.305: U1.44 25.29,49.42 21.84,45.97 21.84,40.96 21.46,40.58 19.68,40.58 18.48,41.78 9.97,41.78 9.14,40.96 9.14,35.31 6.41,32.58 6.41,28.64 6.6,28.45 7.11,28.45 7.24,28.32 7.37,28.19 7.37,27.69 | 17.78,25.5 D6.C 17.72,26.23 17.02,26.92 13.97,26.92 13.46,27.43 11.94,27.43 11.68,27.69 7.37,27.69 | 7.37,27.69 7.37,26.42 6.92,25.97 6.92,21.65 6.73,21.46 U2.4
TX2  (via drill 0.3 pad 0.3, 0.5, 0.5 pad 0.3, 0.6)
  Top 0.305: U1.4 24.9,45.22 v24.64,44.96 | D7.C 13.59,25.27 | D7.C 13.37,25.15 12.95,25.15 v11.43,26.67 | J1.4 14.08,14.22 13.21,14.22 12.19,15.24 v12.19,16.26 | v14.41,18.67 14.41,24.32 13.81,24.93 D7.C | v27.81,52.83 27.69,52.96 | v21.84,50.04 23.11,50.04 25.91,52.83 v27.81,52.83 | Q2.3 30.04,56.96 28.83,55.88 28.83,53.85 v27.81,52.83
  Bottom 0.305: v11.43,26.67 9.4,28.7 9.4,36.58 15.75,42.93 15.75,49.02 16.76,50.04 v21.84,50.04 | v12.19,16.26 12.19,18.03 12.76,18.61 14.61,18.61 v14.41,18.67 | v24.64,44.96 24.64,49.53 26.16,51.05 28.38,51.05 29.15,52.07 29.15,53.2 R8.1 28.07,53.09 v27.81,52.83
U2-RE/DE
  Top 0.305: U1.43 29.95,50.83 29.65,51.12 28.64,51.12 28.38,50.86 28.38,50.35 28.07,50.04 24.96,50.04 21.27,46.35 21.27,41.47 21.02,41.21 19.94,41.21 18.67,42.48 9.84,42.48 8.57,41.21 8.57,35.81 8.57,35.75 3.05,30.23 3.05,24 | U2.2 4.76,24 3.94,24 3.05,24 | U2.3 3.94,22.73 3.56,23.11 3.05,23.62 3.05,24
VOL
  Top 0.305: U1.24 40.41,40.42 42.55,38.29 42.55,35.12 41.43,34 41.15,33.72 41.08,33.66 30.48,33.66 29.91,33.08 U3.4 29.91,28.38 29.72,28.19 28.32,28.19 28,27.88 U3.1 28.01,25.97 27.69,25.65 27.69,25.07 R12.2

## Text on the board
tNames: RJ